# EAGLE board squematic (EAGLE 7.6.0)
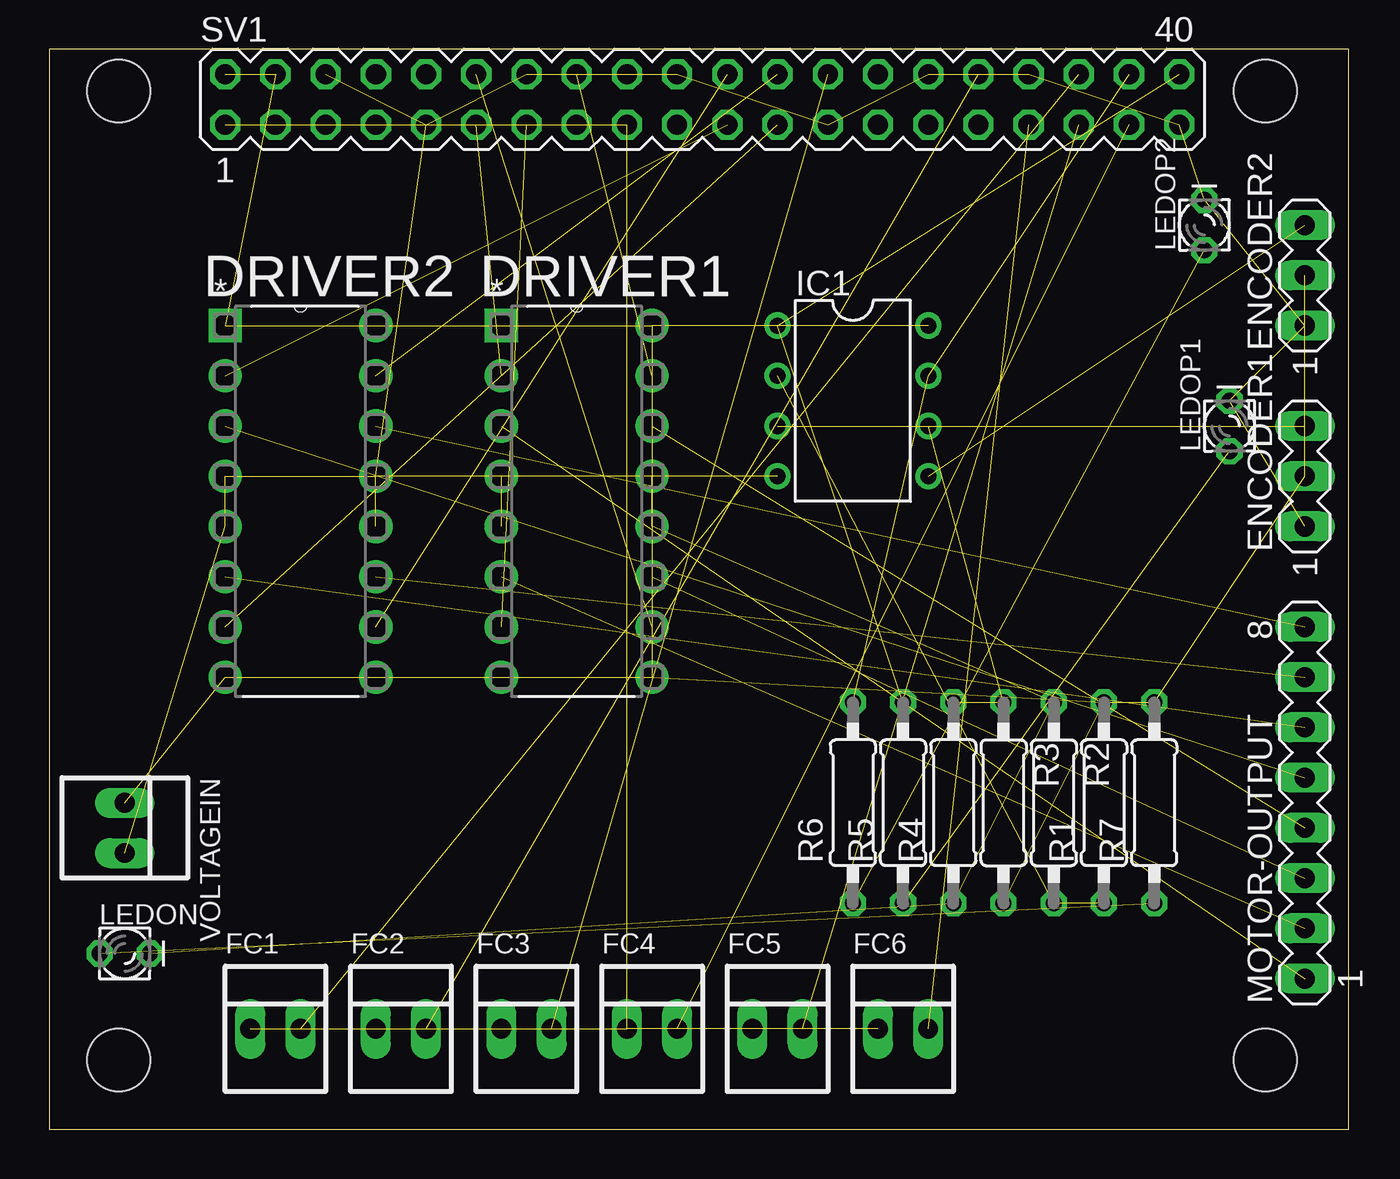
[diagram p0: board, top side]
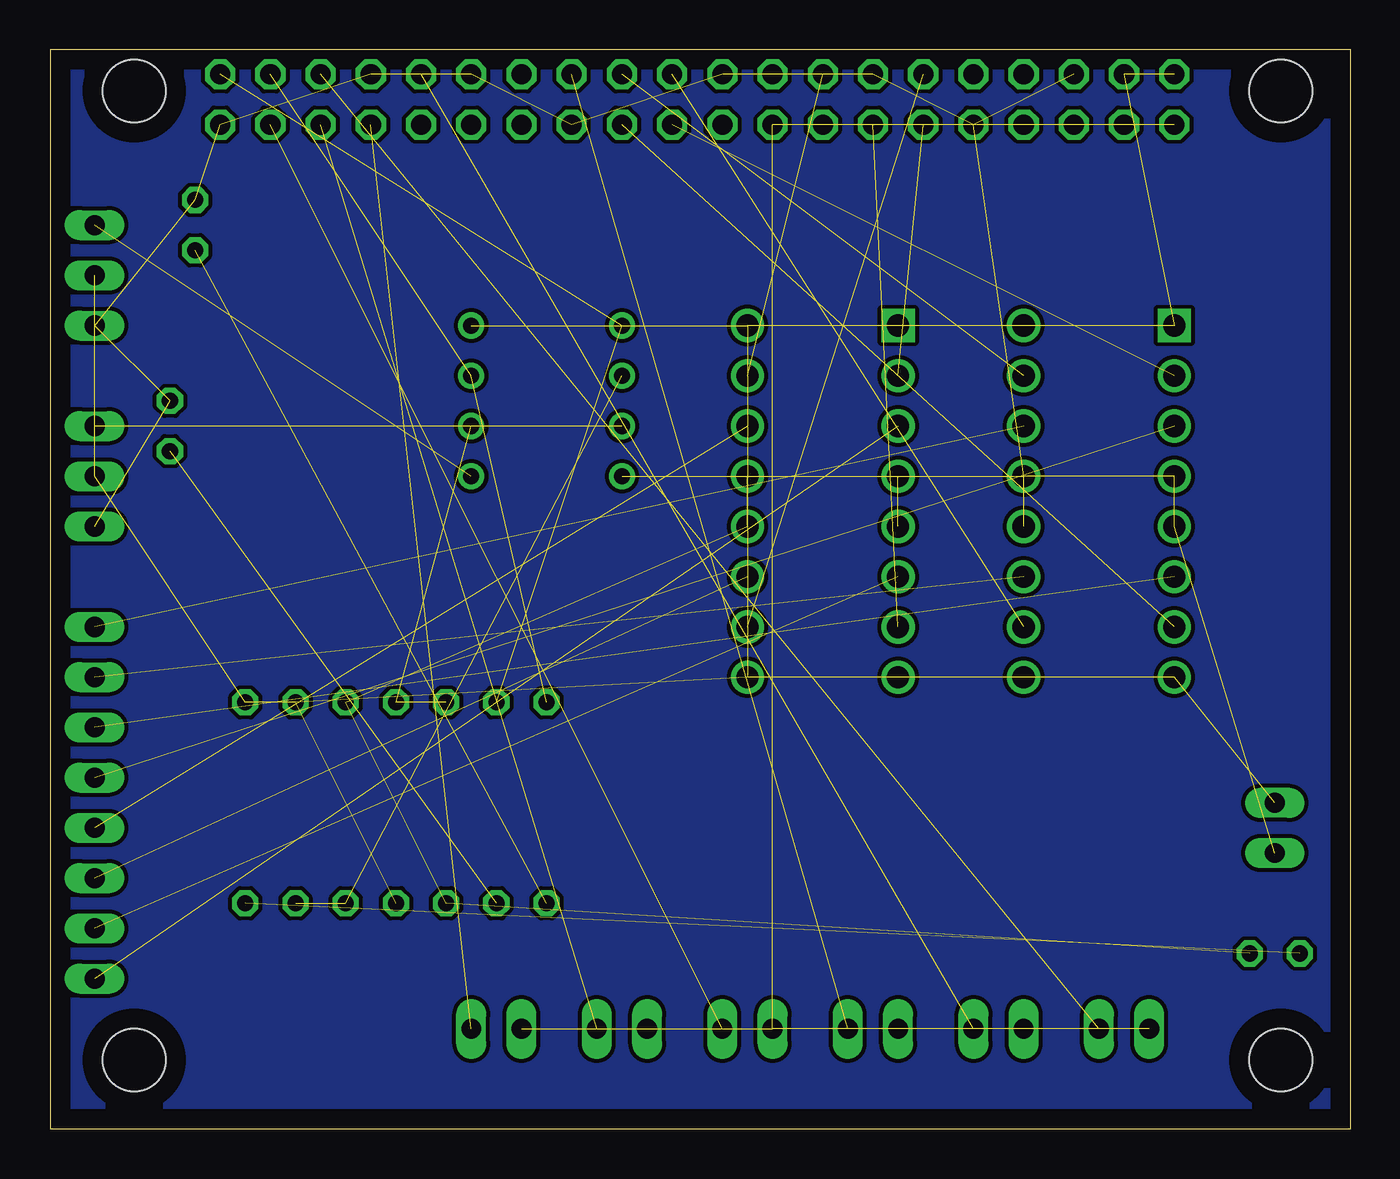
[diagram p1: board, bottom side, seen from below]

Size 65.71 x 54.6 mm. Coordinates in mm from the lower left corner, seen from the top.
Outline: 0,0 65.71,0 65.71,54.6 0,54.6 0,0
Copper layers (1*16): Top 0.035mm / dielectric 1.5mm / Bottom 0.035mm
Design rules "default": minimum track width 10mil, minimum drill 24mil, track to track 8mil, track to pad 8mil, pad to pad 8mil, via to via 8mil, smd to smd 8mil, copper to edge 40mil, drill to drill 8mil, minimum pad ring 10mil, minimum via ring 8mil, stop-mask expansion 4mil, vias tented up to drill 0mil, thermal gap 10mil
Holes 3.17 mm at 3.51,52.5 61.49,52.5 61.49,3.51 3.51,3.51

## Footprints (pad centres in the part's own frame; a part is rotated, then mirrored left to right if it is on the bottom)
DIP254P762X508-16 = drill 1.118 square: 1 -7.62,17.78 | drill 1.118: 2 -7.62,15.24; 3 -7.62,12.7; 4 -7.62,10.16; 5 -7.62,7.62; 6 -7.62,5.08; 7 -7.62,2.54; 8 -7.62,0; 9 0,0; 10 0,2.54; 11 0,5.08; 12 0,7.62; 13 0,10.16; 14 0,12.7; 15 0,15.24; 16 0,17.78
MA03-1 = drill 1.016 long: 1 -2.54,0; 2 0,0; 3 2.54,0
22-23-2021 = drill 1 long: 1 -1.27,0; 2 1.27,0
DIL08 = drill 0.813 pad 1.27: 1 -3.81,-3.81; 2 -1.27,-3.81; 3 1.27,-3.81; 4 3.81,-3.81; 5 3.81,3.81; 6 1.27,3.81; 7 -1.27,3.81; 8 -3.81,3.81
LED_LD260 = drill 0.813 octagon: A -1.27,0; K 1.27,0
MA08-1 = drill 1.016 long: 1 -8.89,0; 2 -6.35,0; 3 -3.81,0; 4 -1.27,0; 5 1.27,0; 6 3.81,0; 7 6.35,0; 8 8.89,0
0207/10 = drill 0.813 octagon: 1 -5.08,0; 2 5.08,0
MA20-2 = drill 1.016 octagon: 1 -24.13,-1.27; 2 -24.13,1.27; 3 -21.59,-1.27; 4 -21.59,1.27; 5 -19.05,-1.27; 6 -19.05,1.27; 7 -16.51,-1.27; 8 -16.51,1.27; 9 -13.97,-1.27; 10 -13.97,1.27; 11 -11.43,-1.27; 12 -11.43,1.27; 13 -8.89,-1.27; 14 -8.89,1.27; 15 -6.35,-1.27; 16 -6.35,1.27; 17 -3.81,-1.27; 18 -3.81,1.27; 19 -1.27,-1.27; 20 -1.27,1.27; 21 1.27,-1.27; 22 1.27,1.27; 23 3.81,-1.27; 24 3.81,1.27; 25 6.35,-1.27; 26 6.35,1.27; 27 8.89,-1.27; 28 8.89,1.27; 29 11.43,-1.27; 30 11.43,1.27; 31 13.97,-1.27; 32 13.97,1.27; 33 16.51,-1.27; 34 16.51,1.27; 35 19.05,-1.27; 36 19.05,1.27; 37 21.59,-1.27; 38 21.59,1.27; 39 24.13,-1.27; 40 24.13,1.27

## Placement (x,y rotation side)
DRIVER1  L293DNE  [DIP254P762X508-16]  30.48,22.86 0 top
DRIVER2  L293DNE  [DIP254P762X508-16]  16.51,22.86 0 top
ENCODER1  [MA03-1]  63.5,33.02 90 top
ENCODER2  [MA03-1]  63.5,43.18 90 top
FC1  22-23-2021  [22-23-2021]  11.43,5.08 0 top
FC2  22-23-2021  [22-23-2021]  17.78,5.08 0 top
FC3  22-23-2021  [22-23-2021]  24.13,5.08 0 top
FC4  22-23-2021  [22-23-2021]  30.48,5.08 0 top
FC5  22-23-2021  [22-23-2021]  36.83,5.08 0 top
FC6  22-23-2021  [22-23-2021]  43.18,5.08 0 top
IC1  LM358N  [DIL08]  40.64,36.83 270 top
LEDON  [LED_LD260]  3.81,8.89 0 top
LEDOP1  [LED_LD260]  59.69,35.56 90 top
LEDOP2  [LED_LD260]  58.42,45.72 90 top
MOTOR-OUTPUT  [MA08-1]  63.5,16.51 90 top
R1  3k9  [0207/10]  53.34,16.51 90 top
R2  1k  [0207/10]  50.8,16.51 270 top
R3  3k9  [0207/10]  48.26,16.51 270 top
R4  1k  [0207/10]  45.72,16.51 90 top
R5  3k9  [0207/10]  43.18,16.51 90 top
R6  3k9  [0207/10]  40.64,16.51 90 top
R7  330  [0207/10]  55.88,16.51 90 top
SV1  [MA20-2]  33.02,52.07 0 top
VOLTAGEIN  22-23-2021  [22-23-2021]  3.81,15.24 270 top

## Library data of the parts
DRIVER1 DRIVER2 = Texas Instruments_By_element14_Batch_1; MPN: L293DNE; OC_FARNELL: 1470423; OC_NEWARK: 06F9523; PACKAGE: PDIP-16; SUPPLIER: Texas Instruments
ENCODER1 ENCODER2 MOTOR-OUTPUT SV1 = con-lstb; OC_FARNELL: unknown; OC_NEWARK: unknown
FC1-FC6 VOLTAGEIN = con-molex; MF: MOLEX; MPN: 22-23-2021; OC_FARNELL: 1462926; OC_NEWARK: 25C3832
IC1 = linear
LEDON LEDOP1 LEDOP2 = eagle-ltspice; SPICEMODEL: NONE; SPICEPREFIX: D; SPICETYPE: diode
R1-R7 = rcl

## Nets
+3V3: FC1.1 FC2.1 FC3.1 FC4.1 FC5.1 FC6.1 SV1.1 SV1.17
+5V: DRIVER1.1 DRIVER1.9 DRIVER1.16 DRIVER2.1 DRIVER2.9 DRIVER2.16 ENCODER1.2 ENCODER2.2 IC1.8 R1.2 R3.2 R7.2 SV1.2 SV1.4
CLK(GPIO4): SV1.7
GND: DRIVER1.4 DRIVER1.5 DRIVER1.12 DRIVER1.13 DRIVER2.4 DRIVER2.5 DRIVER2.12 DRIVER2.13 ENCODER1.1 ENCODER2.1 IC1.4 LEDON.K LEDOP1.K LEDOP2.K R2.1 R4.1 SV1.6 SV1.9 SV1.14 SV1.20 SV1.25 SV1.30 SV1.34 SV1.39 VOLTAGEIN.2
GPIO5: SV1.29
GPIO6: SV1.31
GPIO7: FC3.2 SV1.26
GPIO8: DRIVER2.15 SV1.24
GPIO9: DRIVER2.2 SV1.21
GPIO10: SV1.19
GPIO11: DRIVER2.7 SV1.23
GPIO12: FC2.2 SV1.32
GPIO13: FC6.2 SV1.33
GPIO16: FC1.2 SV1.36
GPIO17: DRIVER1.2 SV1.11
GPIO18: DRIVER1.10 SV1.12
GPIO19: FC5.2 SV1.35
GPIO20: IC1.7 R6.2 SV1.38
GPIO21: IC1.1 R5.2 SV1.40
GPIO22: SV1.15
GPIO23: DRIVER1.15 SV1.16
GPIO24: SV1.18
GPIO25: DRIVER2.10 SV1.22
GPIO26: FC4.2 SV1.37
GPIO27: DRIVER1.7 SV1.13
I2C/SCL: SV1.5
I2C/SDA: SV1.3
ID_SC: SV1.28
ID_SD: SV1.27
M1+: DRIVER1.3 MOTOR-OUTPUT.1
M1-: DRIVER1.6 MOTOR-OUTPUT.2
M2+: DRIVER1.11 MOTOR-OUTPUT.3
M2-: DRIVER1.14 MOTOR-OUTPUT.4
M3+: DRIVER2.3 MOTOR-OUTPUT.5
M3-: DRIVER2.6 MOTOR-OUTPUT.6
M4+: DRIVER2.11 MOTOR-OUTPUT.7
M4-: DRIVER2.14 MOTOR-OUTPUT.8
N$1: IC1.2 R1.1 R2.2
N$2: IC1.6 R3.1 R4.2
N$3: LEDOP1.A R5.1
N$7: LEDOP2.A R6.1
N$8: LEDON.A R7.1
RX: SV1.10
SIGNAL1: ENCODER1.3 IC1.3
SIGNAL2: ENCODER2.3 IC1.5
TX: SV1.8
VIN: DRIVER1.8 DRIVER2.8 VOLTAGEIN.1

## Tracks (layer width: path | path; a pad name or v marks a point on that pad's centre or on a via)
+3V3  (7 unrouted)
+5V  (13 unrouted)
GND  (24 unrouted)
GPIO7  (1 unrouted)
GPIO8  (1 unrouted)
GPIO9  (1 unrouted)
GPIO11  (1 unrouted)
GPIO12  (1 unrouted)
GPIO13  (1 unrouted)
GPIO16  (1 unrouted)
GPIO17  (1 unrouted)
GPIO18  (1 unrouted)
GPIO19  (1 unrouted)
GPIO20  (2 unrouted)
GPIO21  (2 unrouted)
GPIO23  (1 unrouted)
GPIO25  (1 unrouted)
GPIO26  (1 unrouted)
GPIO27  (1 unrouted)
M1+  (1 unrouted)
M1-  (1 unrouted)
M2+  (1 unrouted)
M2-  (1 unrouted)
M3+  (1 unrouted)
M3-  (1 unrouted)
M4+  (1 unrouted)
M4-  (1 unrouted)
N$1  (2 unrouted)
N$2  (2 unrouted)
N$3  (1 unrouted)
N$4
  pour Bottom: 0,54.61 66.04,54.61 66.04,43.18 66.04,0 0,0
N$7  (1 unrouted)
N$8  (1 unrouted)
SIGNAL1  (1 unrouted)
SIGNAL2  (1 unrouted)
VIN  (2 unrouted)